# EAGLE board expandio (EAGLE 5.07)
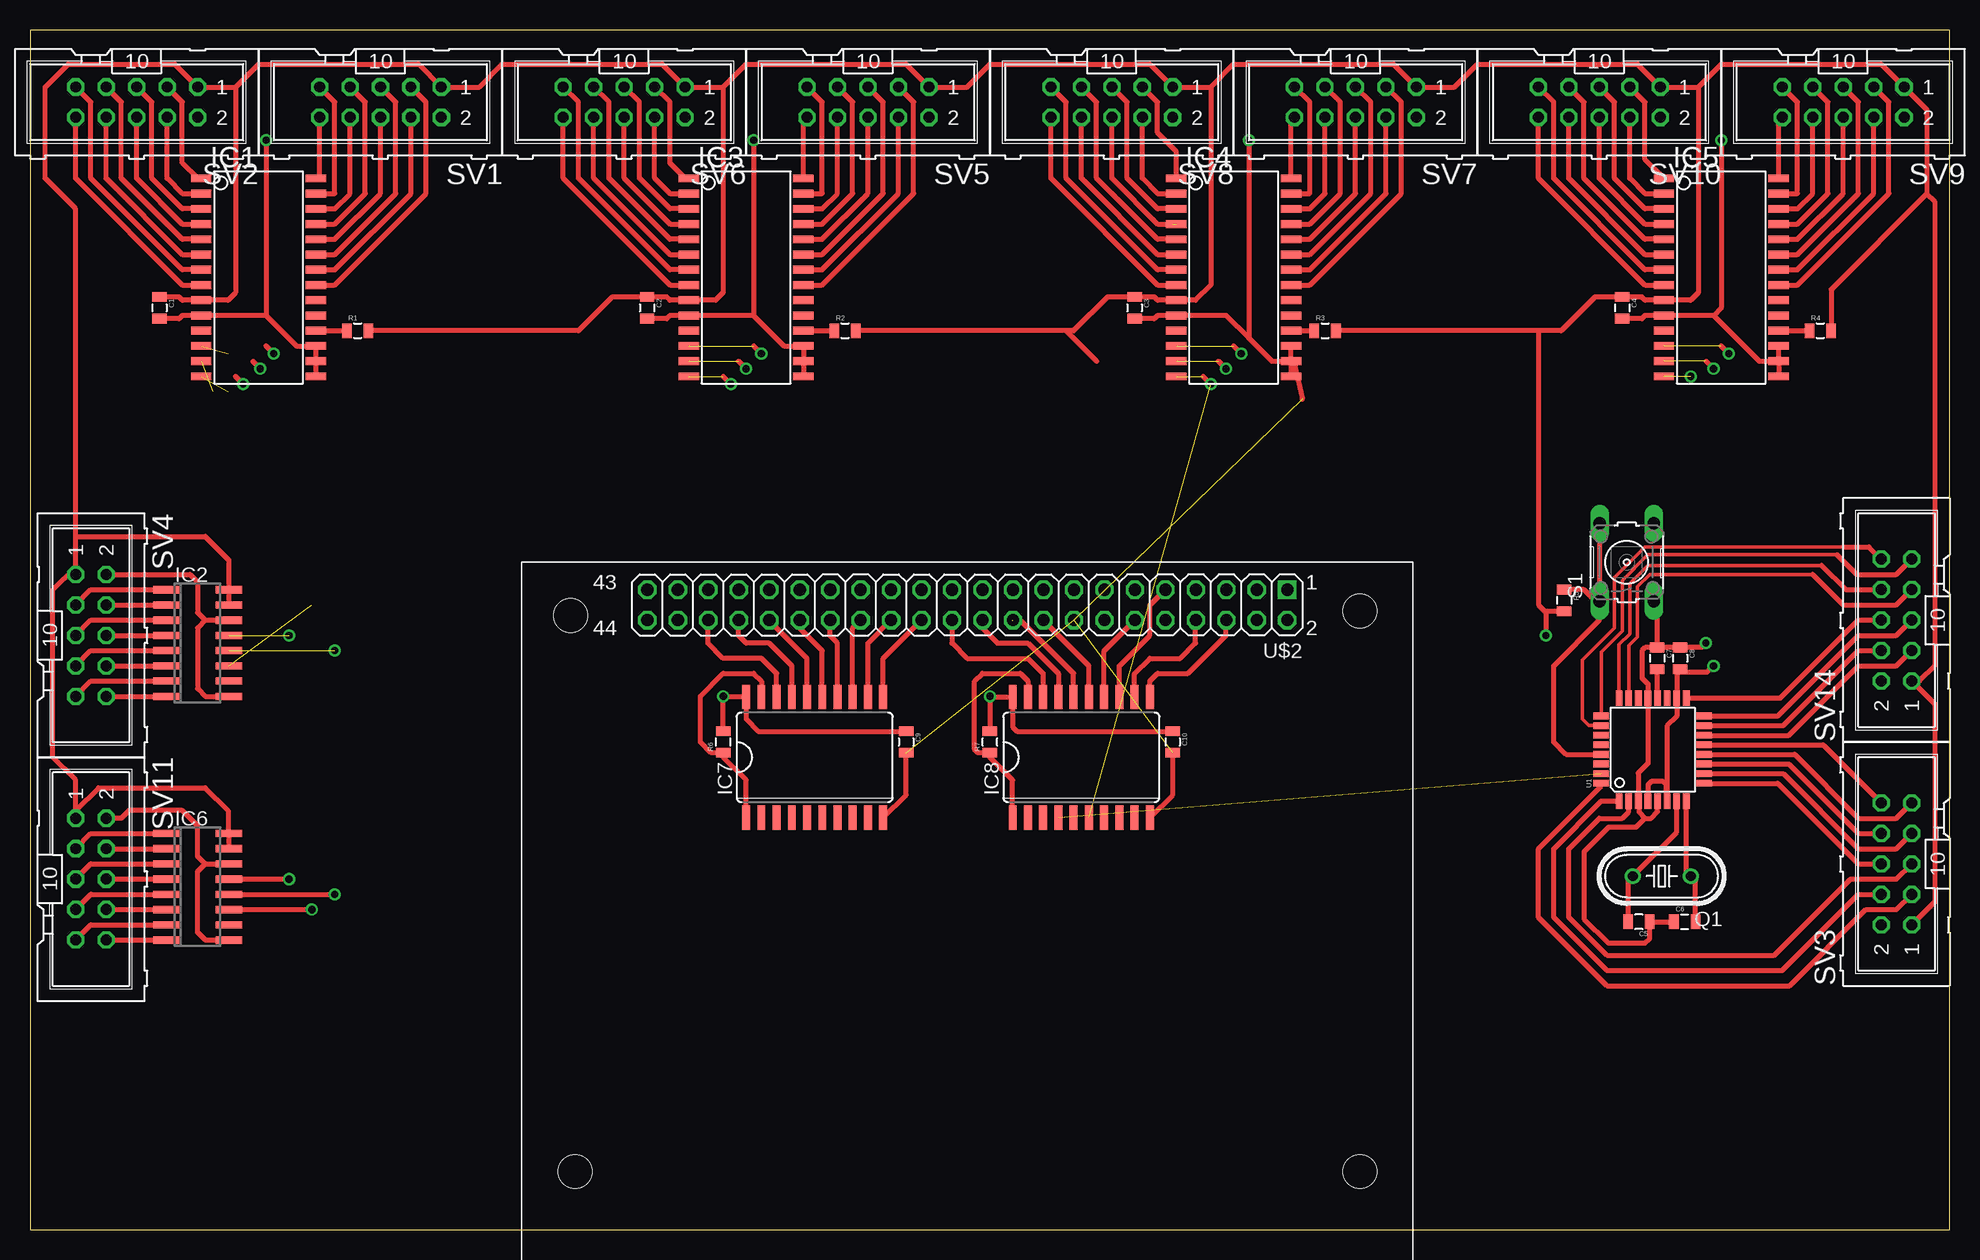
[diagram p0: board, top side]
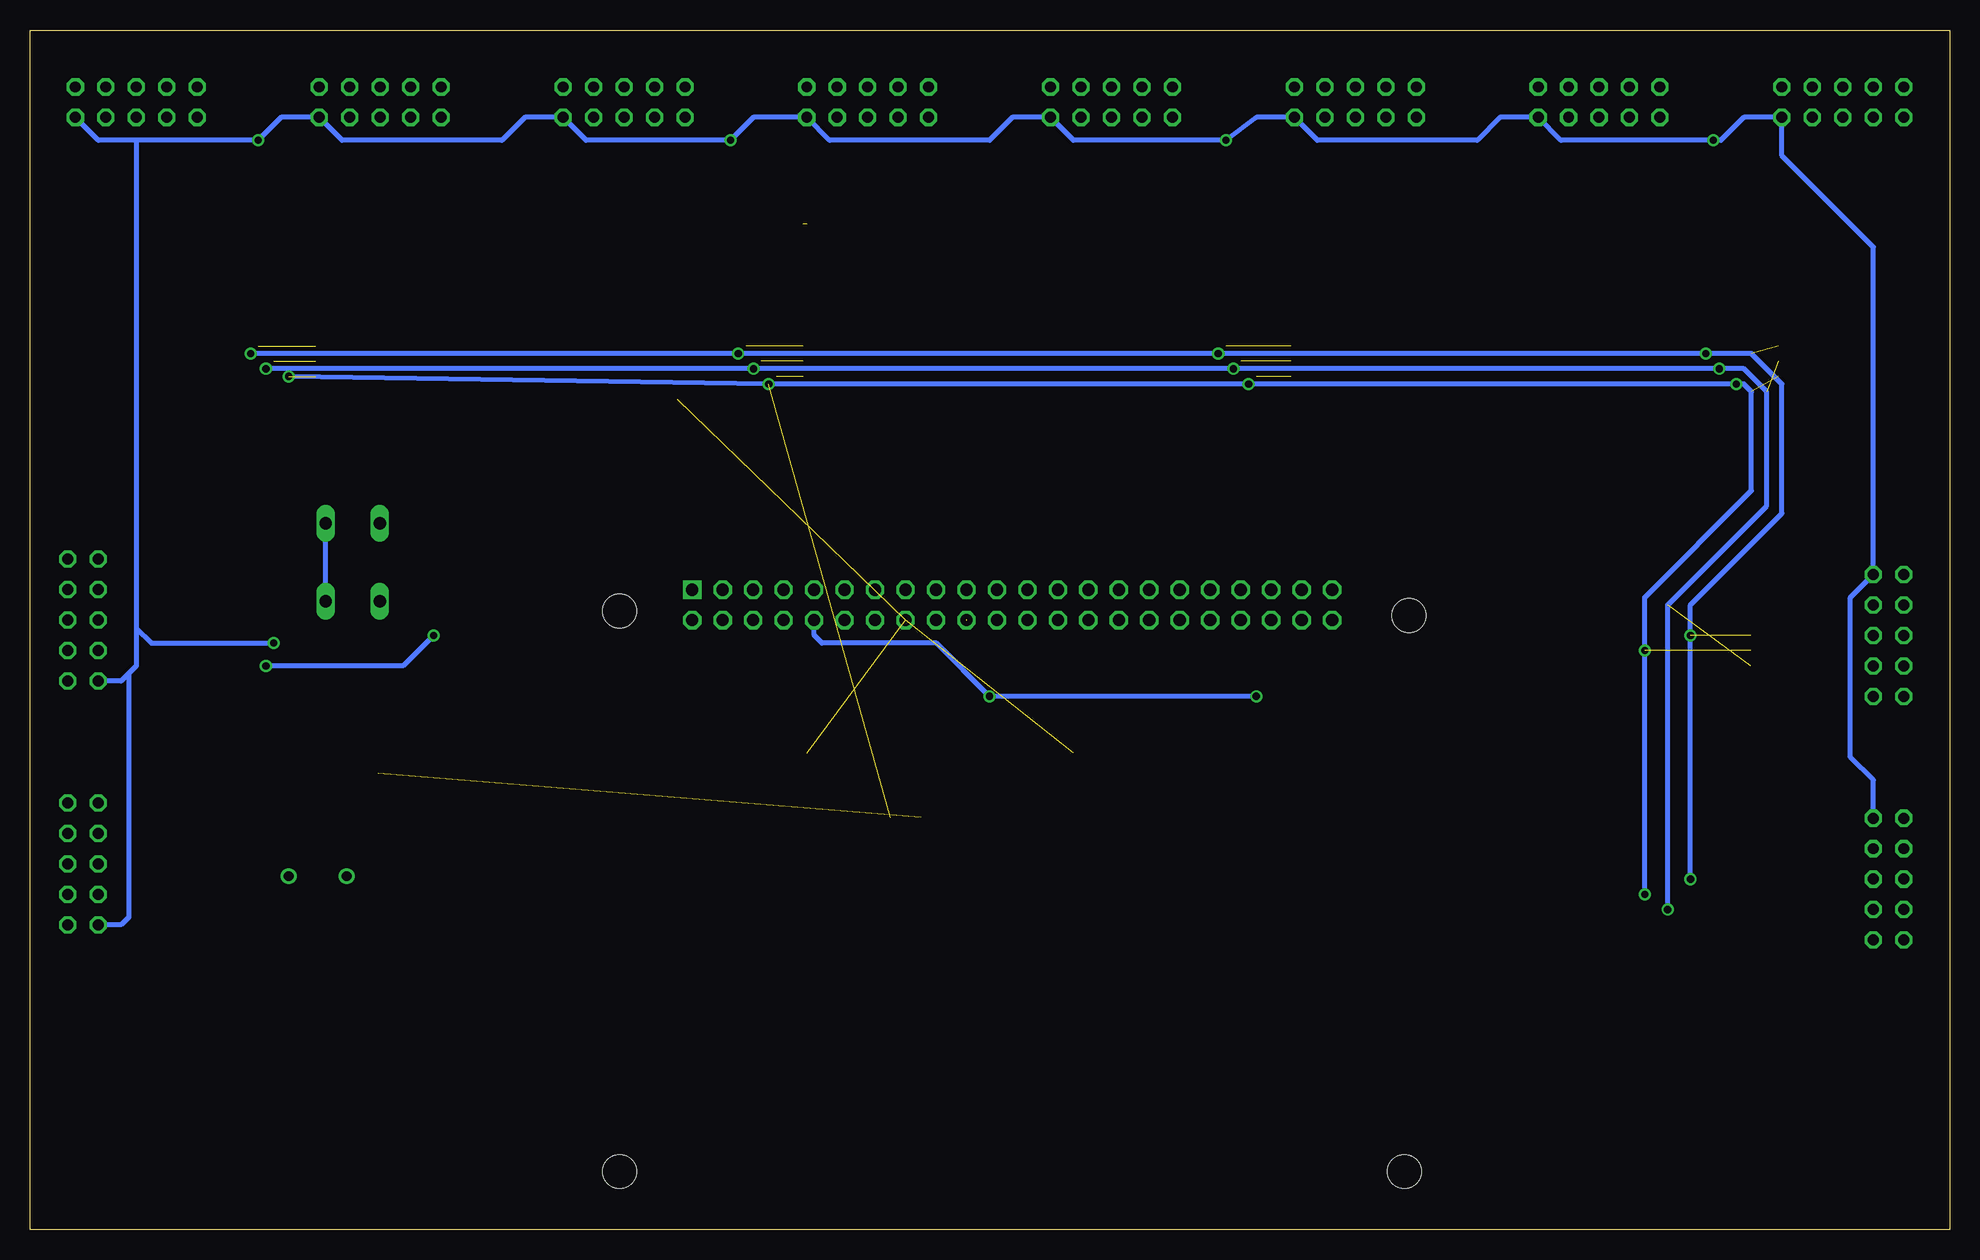
[diagram p1: board, bottom side, seen from below]

Size 160 x 100 mm. Coordinates in mm from the lower left corner, seen from the top.
Outline: 0,0 160,0 160,100 0,100 0,0
Copper layers (1*16): Top 0.035mm / dielectric 1.5mm / Bottom 0.035mm
Design rules "default": minimum track width 10mil, minimum drill 24mil, track to track 8mil, track to pad 8mil, pad to pad 8mil, via to via 8mil, smd to smd 8mil, copper to edge 40mil, drill to drill 8mil, minimum pad ring 10mil, minimum via ring 8mil, stop-mask expansion 4mil, vias tented up to drill 0mil, thermal gap 10mil

## Footprints (pad centres in the part's own frame; a part is rotated, then mirrored left to right if it is on the bottom)
0805 = smd 0.8 x 1.2: 1 -0.9,0; 2 0.9,0
SO28W = smd 0.65 x 1.7: 1 -7.62,-4.78; 2 -6.35,-4.78; 3 -5.08,-4.78; 4 -3.81,-4.78; 5 -2.54,-4.78; 6 -1.27,-4.78; 7 0,-4.78; 8 1.27,-4.78; 9 2.54,-4.78; 10 3.81,-4.78; 11 5.08,-4.78; 12 6.35,-4.78; 13 7.62,-4.78; 14 8.89,-4.78; 15 8.89,4.78; 16 7.62,4.78; 17 6.35,4.78; 18 5.08,4.78; 19 3.81,4.78; 20 2.54,4.78; 21 1.27,4.78; 22 0,4.78; 23 -1.27,4.78; 24 -2.54,4.78; 25 -3.81,4.78; 26 -5.08,4.78; 27 -6.35,4.78; 28 -7.62,4.78
SO16 = smd 0.6 x 2.2: 1 -4.445,-2.6; 2 -3.175,-2.6; 3 -1.905,-2.6; 4 -0.635,-2.6; 5 0.635,-2.6; 6 1.905,-2.6; 7 3.175,-2.6; 8 4.445,-2.6; 9 4.445,2.6; 10 3.175,2.6; 11 1.905,2.6; 12 0.635,2.6; 13 -0.635,2.6; 14 -1.905,2.6; 15 -3.175,2.6; 16 -4.445,2.6
SO20W = smd 0.66 x 2.032: 1 -5.715,-5.029; 2 -4.445,-5.029; 3 -3.175,-5.029; 4 -1.905,-5.029; 5 -0.635,-5.029; 6 0.635,-5.029; 7 1.905,-5.029; 8 3.175,-5.029; 9 4.445,-5.029; 10 5.715,-5.029; 11 5.715,5.029; 12 4.445,5.029; 13 3.175,5.029; 14 1.905,5.029; 15 0.635,5.029; 16 -0.635,5.029; 17 -1.905,5.029; 18 -3.175,5.029; 19 -4.445,5.029; 20 -5.715,5.029
HC49U-V = drill 0.813 round: 1 -2.413,0; 2 2.413,0
B3F-10XX = drill 1.016 long: 1 -3.251,2.261; 2 3.251,2.261; 3 -3.251,-2.261; 4 3.251,-2.261
ML10 = drill 0.914 octagon: 1 -5.08,-1.27; 2 -5.08,1.27; 3 -2.54,-1.27; 4 -2.54,1.27; 5 0,-1.27; 6 0,1.27; 7 2.54,-1.27; 8 2.54,1.27; 9 5.08,-1.27; 10 5.08,1.27
TQFP32-08 = smd 1.27 x 0.559: 1 -4.293,2.8; 2 -4.293,2; 3 -4.293,1.2; 4 -4.293,0.4; 5 -4.293,-0.4; 6 -4.293,-1.2; 7 -4.293,-2; 8 -4.293,-2.8; 17 4.293,-2.8; 18 4.293,-2; 19 4.293,-1.2; 20 4.293,-0.4; 21 4.293,0.4; 22 4.293,1.2; 23 4.293,2; 24 4.293,2.8 | smd 0.559 x 1.27: 9 -2.8,-4.293; 10 -2,-4.293; 11 -1.2,-4.293; 12 -0.4,-4.293; 13 0.4,-4.293; 14 1.2,-4.293; 15 2,-4.293; 16 2.8,-4.293; 25 2.8,4.293; 26 2,4.293; 27 1.2,4.293; 28 0.4,4.293; 29 -0.4,4.293; 30 -1.2,4.293; 31 -2,4.293; 32 -2.8,4.293
TS-7500 = drill 1.016 square: 1 2.54,63.5 | drill 1.016 octagon: 2 5.08,63.5; 3 2.54,60.96; 4 5.08,60.96; 5 2.54,58.42; 6 5.08,58.42; 7 2.54,55.88; 8 5.08,55.88; 9 2.54,53.34; 10 5.08,53.34; 11 2.54,50.8; 12 5.08,50.8; 13 2.54,48.26; 14 5.08,48.26; 15 2.54,45.72; 16 5.08,45.72; 17 2.54,43.18; 18 5.08,43.18; 19 2.54,40.64; 20 5.08,40.64; 21 2.54,38.1; 22 5.08,38.1; 23 2.54,35.56; 24 5.08,35.56; 25 2.54,33.02; 26 5.08,33.02; 27 2.54,30.48; 28 5.08,30.48; 29 2.54,27.94; 30 5.08,27.94; 31 2.54,25.4; 32 5.08,25.4; 33 2.54,22.86; 34 5.08,22.86; 35 2.54,20.32; 36 5.08,20.32; 37 2.54,17.78; 38 5.08,17.78; 39 2.54,15.24; 40 5.08,15.24; 41 2.54,12.7; 42 5.08,12.7; 43 2.54,10.16; 44 5.08,10.16 | hole 2.8: 4.699,3.759; 51.054,4.14; 4.318,69.545; 51.054,69.545

## Placement (x,y rotation side)
C1  0.1uF  [0805]  10.79,76.83 270 top
C2  0.1uF  [0805]  51.44,76.83 270 top
C3  0.1uF  [0805]  92.08,76.83 270 top
C4  0.1uF  [0805]  132.72,76.83 270 top
C5  15pF  [0805]  134.11,25.65 180 top
C6  15pF  [0805]  137.92,25.65 0 top
C7  0.1uF  [0805]  135.64,47.62 270 top
C8  0.1uF  [0805]  137.54,47.62 270 top
C9  0.1uF  [0805]  73.03,40.64 270 top
C10  0.1uF  [0805]  95.25,40.64 270 top
IC1  MCP23S17SO  [SO28W]  19.05,80.01 270 top
IC2  MCP3204SOIC  [SO16]  13.97,48.9 270 top
IC3  MCP23S17SO  [SO28W]  59.69,80.01 270 top
IC4  MCP23S17SO  [SO28W]  100.33,80.01 270 top
IC5  MCP23S17SO  [SO28W]  140.97,80.01 270 top
IC6  MCP3204SOIC  [SO16]  13.97,28.57 270 top
IC7  74LCX541WM  [SO20W]  65.41,39.37 0 top
IC8  74LCX541WM  [SO20W]  87.63,39.37 0 top
Q1  16Mhz  [HC49U-V]  136.02,29.46 180 top
R1  10K  [0805]  27.3,74.93 0 top
R2  10K  [0805]  67.94,74.93 0 top
R3  10K  [0805]  107.95,74.93 0 top
R4  10K  [0805]  149.22,74.93 0 top
R5  10K  [0805]  127.89,52.45 270 top
R6  10K  [0805]  57.78,40.64 90 top
R7  10K  [0805]  80.01,40.64 90 top
S1  [B3F-10XX]  133.1,55.63 90 top
SV1  [ML10]  29.21,93.98 180 top
SV2  [ML10]  8.89,93.98 180 top
SV3  [ML10]  155.57,30.48 90 top
SV4  [ML10]  5.08,49.53 270 top
SV5  [ML10]  69.85,93.98 180 top
SV6  [ML10]  49.53,93.98 180 top
SV7  [ML10]  110.49,93.98 180 top
SV8  [ML10]  90.17,93.98 180 top
SV9  [ML10]  151.13,93.98 180 top
SV10  [ML10]  130.81,93.98 180 top
SV11  [ML10]  5.08,29.21 270 top
SV14  [ML10]  155.57,50.8 90 top
U1  ATMEGA168  [TQFP32-08]  135.25,40.01 90 top
U$2  TS-7500  [TS-7500]  41.3,55.88 270 top

## Library data of the parts
C1-C10 Q1 R1-R7 U1 = SparkFun
IC1 IC3-IC5 = microchip
IC2 IC6 = reprap
IC7 IC8 = 74xx-us
S1 = switch-omron
SV1-SV11 SV14 = con-harting-ml
U$2 = MakerBot

## Nets
3.3V: C9.1 C10.1 IC7.20 IC8.20 R6.2 R7.2 U$2.10
5V: U$2.15
5V_CONSOLE_RX: IC8.8
5V_IN18: IC8.5
5V_IN28: IC7.8
5V_IN30: IC7.7
5V_IN38: IC7.3
5V_IN40: IC7.2
5V_MISO: IC1.14 IC2.12 IC3.14 IC4.14 IC5.14 IC6.12 IC8.6
5V_MOSI: IC1.13 IC2.11 IC3.13 IC4.13 IC5.13 IC6.11
5V_RESET: IC8.7
5V_RX0: IC8.9
5V_RX1: IC8.4 U1.31
5V_RX2: IC8.3
5V_RX3: IC8.2
5V_RX4: IC7.9
5V_RX5: IC7.6
5V_RX6: IC7.5
5V_RX7: IC7.4
5V_SCK: IC1.12 IC2.13 IC3.12 IC4.12 IC5.12 IC6.13
5V_TX1: U1.30
CONSOLE_RX: IC8.12 U$2.8
CONSOLE_TX: U$2.7
DIO17: U$2.17
DIO18: IC8.15 U$2.18
DIO27: U$2.27
DIO28: IC7.12 U$2.28
DIO29: U$2.29
DIO30: IC7.13 U$2.30
DIO37: U$2.37
DIO38: IC7.17 U$2.38
DIO39: U$2.39
DIO40: IC7.18 U$2.40
FLASH_SELECT: U$2.11
GND: C1.2 C2.2 C3.2 C4.2 C5.1 C6.1 C7.1 C8.1 C9.2 C10.2 IC1.10 IC1.15 IC1.16 IC1.17 IC2.9 IC2.14 IC3.10 IC3.15 IC3.16 IC3.17 IC4.10 IC4.15 IC4.16 IC4.17 IC5.10 IC5.15 IC5.16 IC5.17 IC6.9 IC6.14 IC7.10 IC8.10 S1.3 S1.4 SV1.2 SV2.2 SV3.2 SV4.2 SV5.2 SV6.2 SV7.2 SV8.2 SV9.2 SV10.2 SV11.2 SV14.2 U1.3 U1.5 U1.21 U$2.16
GPA0: IC1.21 SV1.3
GPA1: IC1.22 SV1.4
GPA2: IC1.23 SV1.5
GPA3: IC3.21 SV5.3
GPA4: IC3.22 SV5.4
GPA5: IC3.23 SV5.5
GPA6: IC4.21 SV7.3
GPA7: IC4.22 SV7.4
GPA8: IC4.23 SV7.5
GPA9: IC5.21 SV9.3
GPA10: IC5.22 SV9.4
GPA11: IC5.23 SV9.5
JTAG_CLK: U$2.3
JTAG_DIN: U$2.4
JTAG_DOUT: U$2.1
JTAG_TMS: U$2.2
MISO: IC8.14 U$2.12
MOSI: U$2.13
N$1: IC1.24 SV1.6
N$2: IC1.25 SV1.7
N$3: IC1.26 SV1.8
N$4: IC1.27 SV1.9
N$5: IC1.18 R1.1
N$6: IC1.28 SV1.10
N$7: IC1.1 SV2.3
N$8: IC1.2 SV2.4
N$9: IC1.3 SV2.5
N$10: IC1.4 SV2.6
N$11: IC1.5 SV2.7
N$12: IC1.6 SV2.8
N$13: IC1.7 SV2.9
N$14: IC1.8 SV2.10
N$15: IC2.1 SV4.3
N$16: IC2.2 SV4.4
N$17: IC2.3 SV4.5
N$18: IC2.4 SV4.6
N$19: IC2.5 SV4.7
N$20: IC2.6 SV4.8
N$21: IC2.7 SV4.9
N$22: IC2.8 SV4.10
N$23: IC3.18 R2.1
N$24: IC3.24 SV5.6
N$25: IC3.25 SV5.7
N$26: IC3.26 SV5.8
N$27: IC3.27 SV5.9
N$28: IC3.28 SV5.10
N$29: IC3.1 SV6.3
N$30: IC3.2 SV6.4
N$31: IC3.3 SV6.5
N$32: IC3.4 SV6.6
N$33: IC3.5 SV6.7
N$34: IC3.6 SV6.8
N$35: IC3.7 SV6.9
N$36: IC3.8 SV6.10
N$37: IC4.18 R3.1
N$38: IC4.24 SV7.6
N$39: IC4.25 SV7.7
N$40: IC4.26 SV7.8
N$41: IC4.27 SV7.9
N$42: IC4.28 SV7.10
N$43: IC4.1 SV8.3
N$44: IC4.2 SV8.4
N$45: IC4.3 SV8.5
N$46: IC4.4 SV8.6
N$47: IC4.5 SV8.7
N$48: IC4.6 SV8.8
N$49: IC4.7 SV8.9
N$50: IC4.8 SV8.10
N$51: IC5.18 R4.1
N$52: IC5.24 SV9.6
N$53: IC5.25 SV9.7
N$54: IC5.26 SV9.8
N$55: IC5.27 SV9.9
N$56: IC5.28 SV9.10
N$57: IC5.1 SV10.3
N$58: IC5.2 SV10.4
N$59: IC5.3 SV10.5
N$60: IC5.4 SV10.6
N$61: IC5.5 SV10.7
N$62: IC5.6 SV10.8
N$63: IC5.7 SV10.9
N$64: IC5.8 SV10.10
N$65: IC6.1 SV11.3
N$66: IC6.2 SV11.4
N$67: IC6.3 SV11.5
N$68: IC6.4 SV11.6
N$69: IC6.5 SV11.7
N$70: IC6.6 SV11.8
N$71: IC6.7 SV11.9
N$72: IC6.8 SV11.10
N$73: R5.1 S1.1 S1.2 U1.29
N$74: C7.2 U1.20
N$75: C5.2 Q1.2 U1.7
N$76: C6.2 Q1.1 U1.8
N$77: SV14.7 U1.23
N$78: SV14.8 U1.24
N$79: SV14.9 U1.25
N$80: SV14.10 U1.26
N$81: SV3.3 U1.32
N$82: SV3.4 U1.1
N$83: SV3.5 U1.2
N$84: SV3.6 U1.9
N$85: SV3.7 U1.10
N$86: SV3.8 U1.11
N$87: SV3.9 U1.12
N$88: SV3.10 U1.13
N$89: SV14.3 U1.14
N$90: SV14.4 U1.15
N$91: SV14.5 U1.16
N$92: SV14.6 U1.17
N$95: IC8.1 IC8.19 R7.1
N$96: IC7.1 IC7.19 R6.1
RESET: IC8.13 U$2.9
RX0: IC8.11 U$2.6
RX1: IC8.16 U$2.20
RX2: IC8.17 U$2.22
RX3: IC8.18 U$2.24
RX4: IC7.11 U$2.26
RX5: IC7.14 U$2.32
RX6: IC7.15 U$2.34
RX7: IC7.16 U$2.36
SCK: U$2.14
TX0: U$2.5
TX1: U$2.19
TX2: U$2.21
TX3: U$2.23
TX4: U$2.25
TX5: U$2.31
TX6: U$2.33
TX7: U$2.35
VCC: C1.1 C2.1 C3.1 C4.1 C8.2 IC1.9 IC2.15 IC2.16 IC3.9 IC4.9 IC5.9 IC6.15 IC6.16 R1.2 R2.2 R3.2 R4.2 R5.2 SV1.1 SV2.1 SV3.1 SV4.1 SV5.1 SV6.1 SV7.1 SV8.1 SV9.1 SV10.1 SV11.1 SV14.1 U1.4 U1.6 U1.18

## Tracks (layer width: path | path; a pad name or v marks a point on that pad's centre or on a via)
3.3V  (via drill 0.6)
  Top 0.406: R7.2 v80.01,44.45 80.06,44.4 IC8.20 81.92,41.91 82.28,41.54 C10.1 | R6.2 v57.78,44.45 59.64,44.45 IC7.20 59.69,42.55 60.7,41.54 C9.1
  Bottom 0.406: U$2.10 94.64,49.55 93.98,48.9 84.45,48.9 v80.01,44.45 v57.78,44.45
5V_MISO  (via drill 0.6)  (6 unrouted)
  Top 0.406: v58.42,70.48 57.78,71.12 | v98.42,70.48 97.79,71.12 | IC6.12 v25.4,27.94 | v17.78,70.48 17.14,71.12
  Bottom 0.406: v138.43,71.12 v98.42,70.48 v58.42,70.48 v17.78,70.48 17.14,70.48 16.51,69.85 16.51,61.59 25.4,52.7 v25.4,48.26 v25.4,27.94
5V_MOSI  (via drill 0.6)  (5 unrouted)
  Top 0.406: v140.34,71.75 139.7,72.39 | v59.69,71.75 59.05,72.39 | v99.69,71.75 99.06,72.39 | v19.2,71.75 18.57,72.39 | IC6.11 v23.5,26.67
  Bottom 0.406: v140.34,71.75 v99.69,71.75 v59.69,71.75 v19.2,71.75 17.14,71.75 15.24,69.85 15.24,60.33 23.5,52.07 v23.5,26.67
5V_RX1  (1 unrouted)
5V_SCK  (via drill 0.6)  (5 unrouted)
  Top 0.406: v141.6,73.03 140.97,73.66 | v60.96,73.03 60.33,73.66 | v100.97,73.03 100.33,73.66 | IC6.13 v21.59,29.21 | v20.32,73.03 19.68,73.66
  Bottom 0.406: v141.6,73.03 v100.97,73.03 v60.96,73.03 v20.32,73.03 16.51,73.03 13.97,70.48 13.97,59.69 21.59,52.07 v21.59,49.53 v21.59,29.21
CONSOLE_RX
  Top 0.406: IC8.12 92.08,46.35 93.34,47.62 95.89,47.62 97.16,48.9 97.16,50.77 U$2.8
DIO18
  Top 0.406: IC8.15 88.27,46.99 84.45,50.8 84.45,50.77 U$2.18
DIO28
  Top 0.406: IC7.12 69.85,48.87 U$2.28
DIO30
  Top 0.406: IC7.13 68.58,50.14 U$2.30
DIO38
  Top 0.406: U$2.38 59.08,49.51 59.69,48.9 61.59,48.9 63.5,46.99 IC7.17
DIO40
  Top 0.406: IC7.18 62.23,46.35 60.96,47.62 57.78,47.62 56.52,48.9 56.52,50.77 U$2.40
GND  (via drill 0.6)  (3 unrouted)
  Top 0.406: C1.2 12.44,75.94 12.7,76.2 IC1.10 19.68,76.2 | 19.68,76.2 22.23,73.66 IC1.17 IC1.16 IC1.15 | C2.2 53.08,75.94 53.34,76.2 IC3.10 60.33,76.2 | C3.2 93.72,75.94 93.98,76.2 IC4.10 99.69,76.2 101.6,74.3 | 60.33,76.2 62.87,73.66 IC3.17 IC3.16 IC3.15 | IC4.16 103.5,72.39 101.6,74.3 | IC4.16 IC4.17 | IC4.16 IC4.15 | 140.34,76.2 IC5.10 134.62,76.2 134.35,75.94 C4.2 | IC5.16 144.15,72.39 140.34,76.2 | IC5.16 IC5.17 | IC5.16 IC5.15 | v19.68,90.81 19.68,76.2 | v60.33,90.81 60.33,76.2 | v101.6,90.81 101.6,74.3 | 140.34,76.2 140.97,76.83 v140.97,90.81 | SV4.2 13.34,54.61 13.97,53.98 13.97,51.44 14.61,50.8 | 14.61,50.8 IC2.14 | 14.61,50.8 13.97,50.16 13.97,45.09 14.61,44.45 IC2.9 | SV11.2 7.62,34.29 8.26,34.92 12.7,34.92 13.97,33.66 13.97,31.11 14.61,30.48 | 14.61,30.48 IC6.14 | 14.61,30.48 13.97,29.84 13.97,24.77 14.61,24.13 IC6.9 | 106.05,69.22 105.41,72.09 IC4.16 | U1.5 135.66,34.82 135.13,34.29 134.62,34.29 | 134.62,34.29 134.11,34.8 134.11,35.66 U1.3 134.06,38.04 134.85,38.84 U1.21 134.85,45.48 134.37,45.97 134.37,48.26 134.62,48.51 135.62,48.51 C7.1 | 137.16,25.52 C6.1 C5.1 135.01,24.27 134.62,23.88 131.57,23.88 129.54,25.91 129.54,31.5 131.57,33.53 133.86,33.53 134.62,34.29 | C7.1 C8.1 139.33,48.52 v139.7,48.9 | C7.1 135.64,52.09 S1.3 | C9.2 73.03,36.25 IC7.10 | C10.2 95.25,36.25 IC8.10
  Bottom 0.406: SV9.2 154.31,90.81 151.13,90.81 | 151.13,90.81 v140.97,90.81 139.06,92.71 SV10.2 133.99,90.81 120.65,90.81 118.75,92.71 SV7.2 113.67,90.81 v101.6,90.81 99.69,92.71 SV8.2 93.34,90.81 80.01,90.81 78.11,92.71 SV5.2 73.03,90.81 v60.33,90.81 57.78,92.71 SV6.2 52.7,90.81 39.37,90.81 37.47,92.71 SV1.2 32.38,90.81 v19.68,90.81 19.05,90.81 17.14,92.71 SV2.2 13.97,89.53 6.35,81.92 SV4.2 8.26,52.7 8.26,39.37 6.35,37.47 SV11.2 | S1.3 S1.4 | SV14.2 152.4,45.72 151.76,46.35 | 151.13,90.81 151.13,50.16 | 151.13,50.16 151.13,46.99 151.76,46.35 | SV3.2 152.4,25.4 151.76,26.04 151.76,46.35 | v139.7,48.9 149.86,48.9 151.13,50.16
GPA0
  Top 0.406: IC1.21 25.4,78.74 33.02,86.36 33.02,93.98 SV1.3
GPA1
  Top 0.406: IC1.22 25.4,80.01 31.75,86.36 SV1.4
GPA2
  Top 0.406: IC1.23 25.4,81.28 30.48,86.36 30.48,93.98 SV1.5
GPA3
  Top 0.406: IC3.21 66.04,78.74 73.66,86.36 73.66,93.98 SV5.3
GPA4
  Top 0.406: IC3.22 66.04,80.01 72.39,86.36 SV5.4
GPA5
  Top 0.406: IC3.23 66.04,81.28 71.12,86.36 71.12,93.98 SV5.5
GPA6
  Top 0.406: IC4.21 106.68,78.74 114.3,86.36 114.3,93.98 SV7.3
GPA7
  Top 0.406: IC4.22 106.68,80.01 113.03,86.36 SV7.4
GPA8
  Top 0.406: IC4.23 106.68,81.28 111.76,86.36 111.76,93.98 SV7.5
GPA9
  Top 0.406: IC5.21 147.32,78.74 154.94,86.36 154.94,93.98 SV9.3
GPA10
  Top 0.406: IC5.22 147.32,80.01 153.67,86.36 SV9.4
GPA11
  Top 0.406: IC5.23 147.32,81.28 152.4,86.36 152.4,93.98 SV9.5
MISO
  Top 0.406: IC8.14 89.53,48.23 U$2.12
N$1
  Top 0.406: IC1.24 25.4,82.55 29.21,86.36 SV1.6
N$2
  Top 0.406: IC1.25 25.4,83.82 27.94,86.36 27.94,93.98 SV1.7
N$3
  Top 0.406: IC1.26 25.4,85.09 26.67,86.36 SV1.8
N$4
  Top 0.406: IC1.27 25.4,86.36 25.4,93.98 SV1.9
N$5
  Top 0.406: IC1.18 R1.1
N$6
  Top 0.406: IC1.28 24.13,87.63 SV1.10
N$7
  Top 0.406: IC1.1 13.97,87.63 12.7,88.9 12.7,93.98 SV2.3
N$8
  Top 0.406: IC1.2 12.7,86.36 11.43,87.63 SV2.4
N$9
  Top 0.406: IC1.3 12.7,85.09 10.16,87.63 10.16,93.98 SV2.5
N$10
  Top 0.406: SV2.6 8.89,87.63 12.7,83.82 IC1.4
N$11
  Top 0.406: IC1.5 12.7,82.55 7.62,87.63 7.62,93.98 SV2.7
N$12
  Top 0.406: SV2.8 6.35,87.63 12.7,81.28 IC1.6
N$13
  Top 0.406: IC1.7 12.7,80.01 5.08,87.63 5.08,93.98 SV2.9
N$14
  Top 0.406: SV2.10 3.81,87.63 12.7,78.74 IC1.8
N$15
  Top 0.406: IC2.1 5.08,53.34 SV4.3
N$16
  Top 0.406: SV4.4 IC2.2
N$17
  Top 0.406: IC2.3 5.08,50.8 SV4.5
N$18
  Top 0.406: SV4.6 IC2.4
N$19
  Top 0.406: IC2.5 5.08,48.26 SV4.7
N$20
  Top 0.406: SV4.8 IC2.6
N$21
  Top 0.406: IC2.7 5.08,45.72 SV4.9
N$22
  Top 0.406: SV4.10 IC2.8
N$23
  Top 0.406: IC3.18 R2.1
N$24
  Top 0.406: IC3.24 66.04,82.55 69.85,86.36 SV5.6
N$25
  Top 0.406: IC3.25 66.04,83.82 68.58,86.36 68.58,93.98 SV5.7
N$26
  Top 0.406: IC3.26 66.04,85.09 67.31,86.36 SV5.8
N$27
  Top 0.406: IC3.27 66.04,86.36 66.04,93.98 SV5.9
N$28
  Top 0.406: IC3.28 64.47,92.41 SV5.10
N$29
  Top 0.406: IC3.1 54.61,87.63 53.34,88.9 53.34,93.98 SV6.3
N$30
  Top 0.406: SV6.4 52.07,87.63 53.34,86.36 IC3.2
N$31
  Top 0.406: IC3.3 53.34,85.09 50.8,87.63 50.8,93.98 SV6.5
N$32
  Top 0.406: IC3.4 53.34,83.82 49.53,87.63 SV6.6
N$33
  Top 0.406: SV6.7 48.26,93.98 48.26,87.63 53.34,82.55 IC3.5
N$34
  Top 0.406: IC3.6 53.34,81.28 46.99,87.63 SV6.8
N$35
  Top 0.406: SV6.9 45.72,93.98 45.72,87.63 53.34,80.01 IC3.7
N$36
  Top 0.406: IC3.8 53.34,78.74 44.45,87.63 SV6.10
N$37
  Top 0.406: IC4.18 R3.1
N$38
  Top 0.406: IC4.24 106.68,82.55 110.49,86.36 SV7.6
N$39
  Top 0.406: IC4.25 106.68,83.82 109.22,86.36 109.22,93.98 SV7.7
N$40
  Top 0.406: IC4.26 106.68,85.09 107.95,86.36 SV7.8
N$41
  Top 0.406: IC4.27 106.68,86.36 106.68,93.98 SV7.9
N$42
  Top 0.406: IC4.28 105.11,92.41 SV7.10
N$43
  Top 0.406: IC4.1 95.55,89.87 93.98,91.44 93.98,93.98 SV8.3
N$44
  Top 0.406: IC4.2 93.98,86.36 92.71,87.63 SV8.4
N$45
  Top 0.406: IC4.3 93.98,85.09 91.44,87.63 91.44,93.98 SV8.5
N$46  (1 unrouted)
  Top 0.406: SV8.6 90.17,87.63 93.98,83.82 95.25,83.82
N$47
  Top 0.406: IC4.5 93.98,82.55 88.9,87.63 88.9,93.98 SV8.7
N$48
  Top 0.406: SV8.8 87.63,87.63 93.98,81.28 IC4.6
N$49
  Top 0.406: IC4.7 93.98,80.01 86.36,87.63 86.36,93.98 SV8.9
N$50
  Top 0.406: SV8.10 85.09,87.63 93.98,78.74 IC4.8
N$51
  Top 0.406: IC5.18 R4.1
N$52
  Top 0.406: SV9.6 151.13,86.36 147.32,82.55 IC5.24
N$53
  Top 0.406: IC5.25 147.32,83.82 149.86,86.36 149.86,93.98 SV9.7
N$54
  Top 0.406: IC5.26 147.32,85.09 148.59,86.36 SV9.8
N$55
  Top 0.406: IC5.27 147.32,86.36 147.32,93.98 SV9.9
N$56
  Top 0.406: IC5.28 145.75,92.41 SV9.10
N$57
  Top 0.406: SV10.3 134.62,93.98 134.62,89.2 IC5.1
N$58
  Top 0.406: IC5.2 134.62,86.36 133.35,87.63 SV10.4
N$59
  Top 0.406: SV10.5 132.08,93.98 132.08,87.63 134.62,85.09 IC5.3
N$60
  Top 0.406: IC5.4 134.62,83.82 130.81,87.63 SV10.6
N$61
  Top 0.406: SV10.7 129.54,93.98 129.54,87.63 134.62,82.55 IC5.5
N$62
  Top 0.406: IC5.6 134.62,81.28 128.27,87.63 SV10.8
N$63
  Top 0.406: SV10.9 127,93.98 127,87.63 134.62,80.01 IC5.7
N$64
  Top 0.406: IC5.8 134.62,78.74 125.73,87.63 SV10.10
N$65
  Top 0.406: IC6.1 5.08,33.02 SV11.3
N$66
  Top 0.406: SV11.4 IC6.2
N$67
  Top 0.406: IC6.3 5.08,30.48 SV11.5
N$68
  Top 0.406: SV11.6 IC6.4
N$69
  Top 0.406: IC6.5 5.08,27.94 SV11.7
N$70
  Top 0.406: SV11.8 IC6.6
N$71
  Top 0.406: IC6.7 5.08,25.4 SV11.9
N$72
  Top 0.406: SV11.10 IC6.8
N$73
  Top 0.406: S1.1 130.5,52.38 129.54,53.34 R5.1 | S1.1 S1.2 | U1.29 128.03,39.6 127,40.64 127,46.99 130.81,50.8 130.81,52.35 S1.1
N$74
  Top 0.406: U1.20 135.66,46.71 C7.2
N$75
  Top 0.406: U1.7 137.25,33.12 Q1.2 133.21,29.07 C5.2
N$76
  Top 0.406: U1.8 138.06,29.84 Q1.1 138.82,29.07 C6.2
N$77
  Top 0.305: U1.23 133.25,48.67 133.99,49.4 133.99,53.59 135,54.61 148.59,54.61
  Top 0.406: 148.59,54.61 151.13,52.07 155.57,52.07 SV14.7
N$78
  Top 0.305: U1.24 132.46,48.76 133.35,49.66 133.35,53.85 134.87,55.37 149.35,55.37
  Top 0.406: 149.35,55.37 151.38,53.34 SV14.8
N$79
  Top 0.305: U1.25 130.96,48.16 132.72,49.91 132.72,54.1 134.87,56.26 150.62,56.26
  Top 0.406: 150.62,56.26 152.27,54.61 155.57,54.61 SV14.9
N$80
  Top 0.305: U1.26 129.95,42.01 129.41,42.55 129.41,47.5 132.08,50.16 132.08,54.36 134.62,56.9 151.13,56.9
  Top 0.406: 151.13,56.9 153.29,56.9 SV14.10
N$81
  Top 0.406: U1.32 130.96,36.98 125.73,31.75 125.73,26.04 131.44,20.32 146.69,20.32 153.03,26.67 155.57,26.67 SV3.3
N$82
  Top 0.406: U1.1 130.96,35.71 127,31.75 127,26.04 131.44,21.59 146.05,21.59 152.4,27.94 SV3.4
N$83
  Top 0.406: U1.2 133.25,34.83 132.72,34.29 130.81,34.29 128.27,31.75 128.27,26.04 131.44,22.86 145.41,22.86 151.76,29.21 155.57,29.21 SV3.5
N$84
  Top 0.406: U1.9 145.68,37.2 152.4,30.48 SV3.6
N$85
  Top 0.406: U1.10 146.15,38.01 152.4,31.75 155.57,31.75 SV3.7
N$86
  Top 0.406: U1.11 146.62,38.8 152.4,33.02 SV3.8
N$87
  Top 0.406: U1.12 147.09,39.6 152.4,34.29 155.57,34.29 SV3.9
N$88
  Top 0.406: U1.13 149.46,40.41 SV3.10
N$89
  Top 0.406: U1.14 146.62,41.2 152.4,46.99 155.57,46.99 SV14.3
N$90
  Top 0.406: U1.15 146.15,42.01 152.4,48.26 SV14.4
N$91
  Top 0.406: U1.16 145.68,42.8 152.4,49.53 155.57,49.53 SV14.5
N$92
  Top 0.406: U1.17 145.9,44.3 152.4,50.8 SV14.6
N$95
  Top 0.406: IC8.1 81.92,37.47 80.01,39.37 R7.1 79,39.74 78.74,40.01 78.74,45.72 79.38,46.35 82.55,46.35 83.19,45.72 IC8.19
N$96
  Top 0.406: IC7.1 59.69,37.47 57.78,39.37 R6.1 56.78,39.74 55.88,40.64 55.88,44.45 57.78,46.35 60.33,46.35 60.96,45.72 IC7.19
RESET
  Top 0.406: IC8.13 90.81,46.99 93.34,49.53 93.34,52.05 U$2.9
RX0
  Top 0.406: IC8.11 93.34,45.72 93.98,46.35 96.52,46.35 99.69,49.53 99.69,50.77 U$2.6
RX1  (1 unrouted)
  Top 0.406: IC8.16 87,46.35 82.58,50.77 81.92,50.77
RX2
  Top 0.406: U$2.22 79.4,50.14 80.64,48.9 83.19,48.9 85.72,46.35 IC8.17
RX3
  Top 0.406: IC8.18 84.45,46.35 83.19,47.62 78.11,47.62 76.83,48.9 76.83,50.77 U$2.24
RX4
  Top 0.406: IC7.11 71.12,47.6 U$2.26
RX5
  Top 0.406: U$2.32 66.7,49.51 67.31,48.9 IC7.14
RX6
  Top 0.406: U$2.34 64.16,50.14 66.04,48.26 IC7.15
RX7
  Top 0.406: U$2.36 61.62,50.77 64.77,47.62 IC7.16
VCC  (via drill 0.6)
  Top 0.406: C1.1 12.44,77.73 12.7,77.47 IC1.9 16.51,77.47 17.14,78.11 17.14,95.25 | 17.14,95.25 19.05,97.16 32.38,97.16 SV1.1 37.47,95.25 39.37,97.16 52.7,97.16 SV6.1 57.78,95.25 | 57.78,95.25 59.69,97.16 73.03,97.16 SV5.1 78.11,95.25 80.01,97.16 93.34,97.16 SV8.1 98.42,95.25 | 98.42,95.25 100.33,97.16 113.67,97.16 SV7.1 118.75,95.25 120.65,97.16 133.99,97.16 SV10.1 139.06,95.25 | 17.14,95.25 SV2.1 12.06,97.16 3.17,97.16 1.27,95.25 1.27,87.63 3.81,85.09 3.81,57.78 | 57.78,95.25 57.78,78.11 57.15,77.47 IC3.9 53.34,77.47 53.08,77.73 C2.1 48.52,77.73 45.72,74.93 R1.2 | 98.42,95.25 98.42,78.74 97.16,77.47 IC4.9 93.98,77.47 93.72,77.73 C3.1 89.8,77.73 87,74.93 86.36,74.93 | 86.36,74.93 R2.2 | 125.73,74.93 127.64,74.93 130.44,77.73 C4.1 134.35,77.73 134.62,77.47 IC5.9 138.43,77.47 139.06,78.11 139.06,95.25 | 125.73,74.93 R3.2 | 139.06,95.25 140.97,97.16 154.31,97.16 SV9.1 158.12,93.34 158.12,86.36 | R4.2 150.12,78.37 158.12,86.36 | 3.81,55.24 SV4.1 | 3.81,55.24 3.81,57.78 | IC2.15 IC2.16 16.57,55.82 14.61,57.78 3.81,57.78 | 3.81,55.24 1.91,53.34 1.91,39.37 3.81,37.47 SV11.1 3.81,34.92 5.71,36.83 14.61,36.83 16.51,34.92 16.51,33.08 IC6.16 IC6.15 | 86.36,74.93 88.9,72.39 | U1.4 134.85,37.06 135.13,37.34 136.14,37.34 136.4,37.08 136.4,35.77 U1.6 136.46,41.97 137.25,42.77 U1.18 137.25,46.44 | 137.25,46.44 C8.2 | 126.25,51.55 R5.2 | 126.25,51.55 125.73,52.07 125.73,74.93 | 158.12,86.36 158.75,85.72 158.75,46.99 157.48,45.72 SV14.1 158.75,43.81 158.75,27.3 SV3.1 | 137.25,46.44 139.78,46.44 v140.34,46.99 | v126.36,49.53 126.36,51.44 126.25,51.55
  Bottom 0.406: v140.34,46.99 128.91,46.99 v126.36,49.53